# EAGLE board OLED_Block-Panel-v10 (EAGLE 6.6.0), part 1 of 2
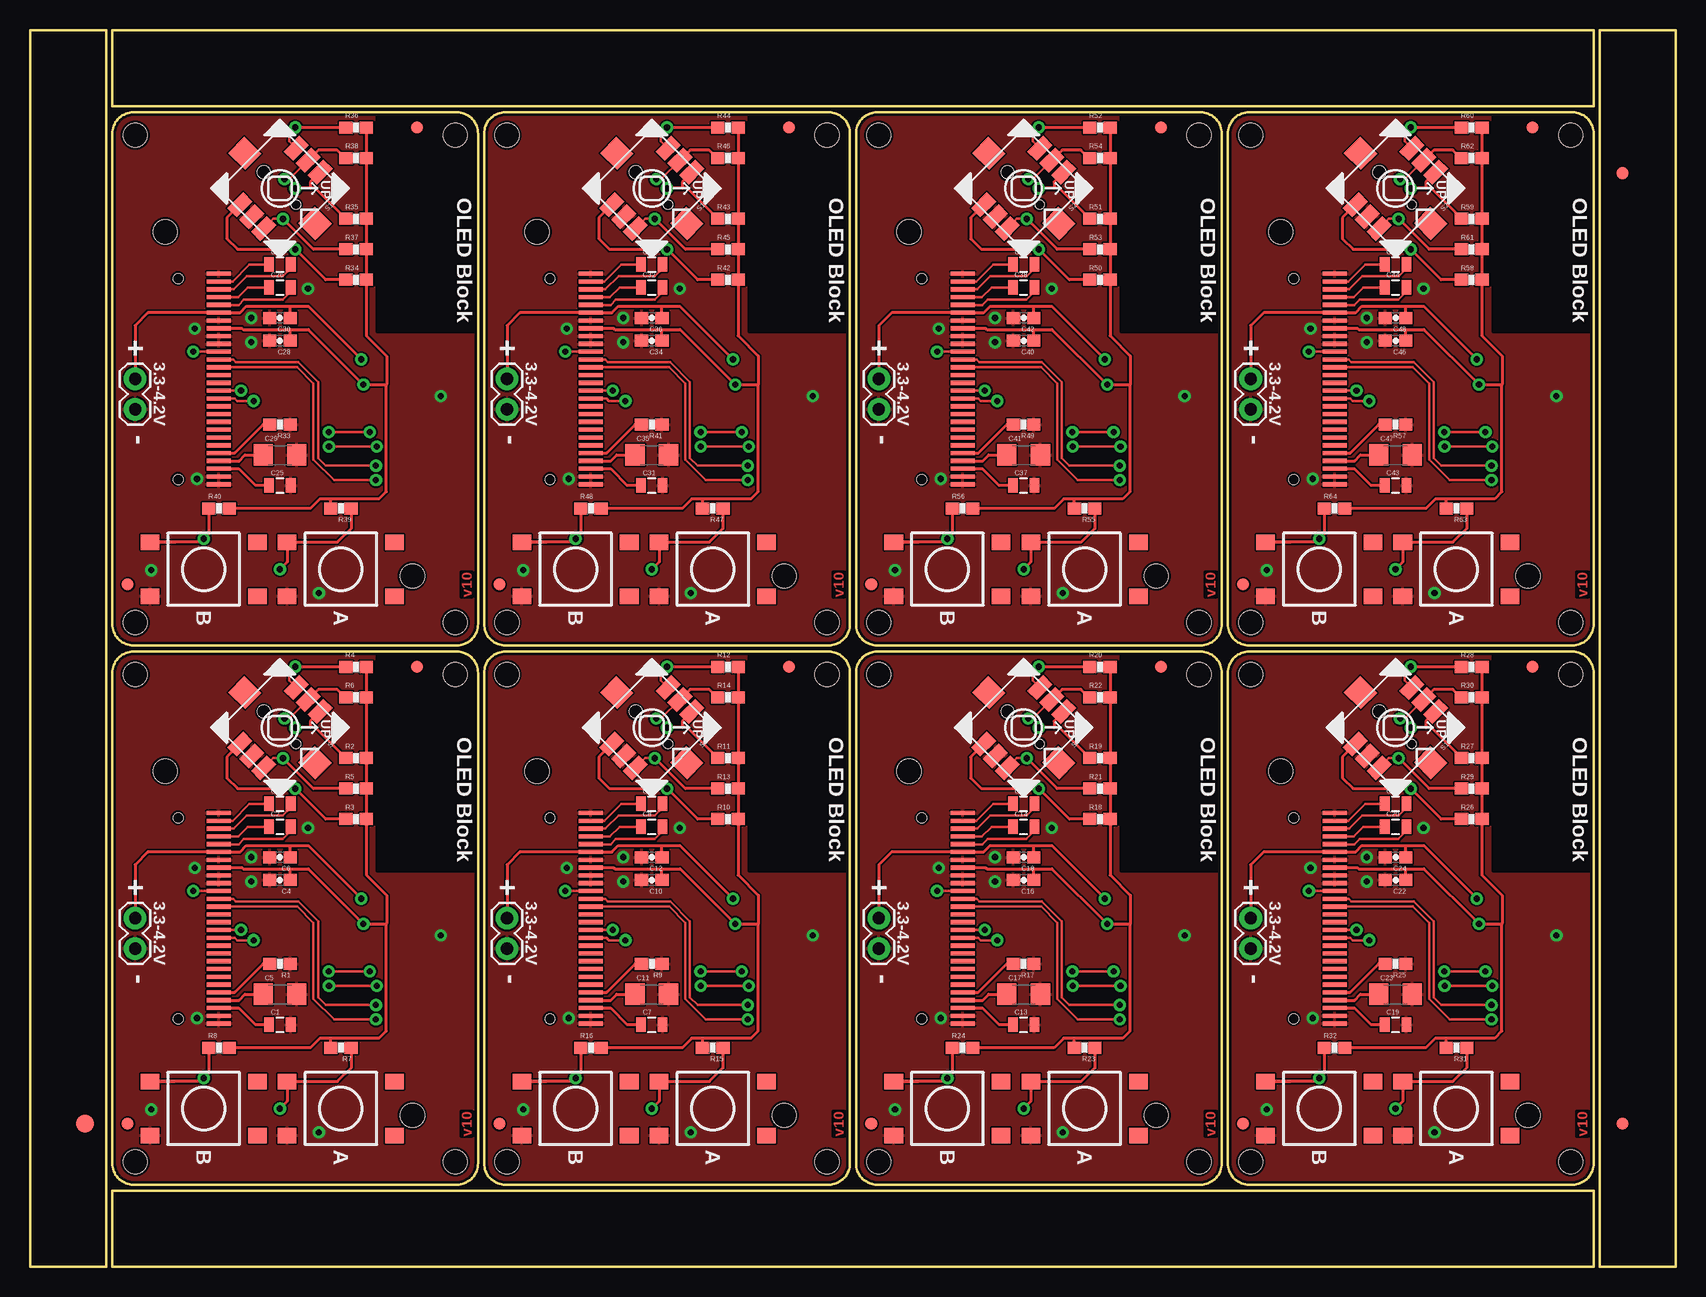
[diagram p0: board, top side]
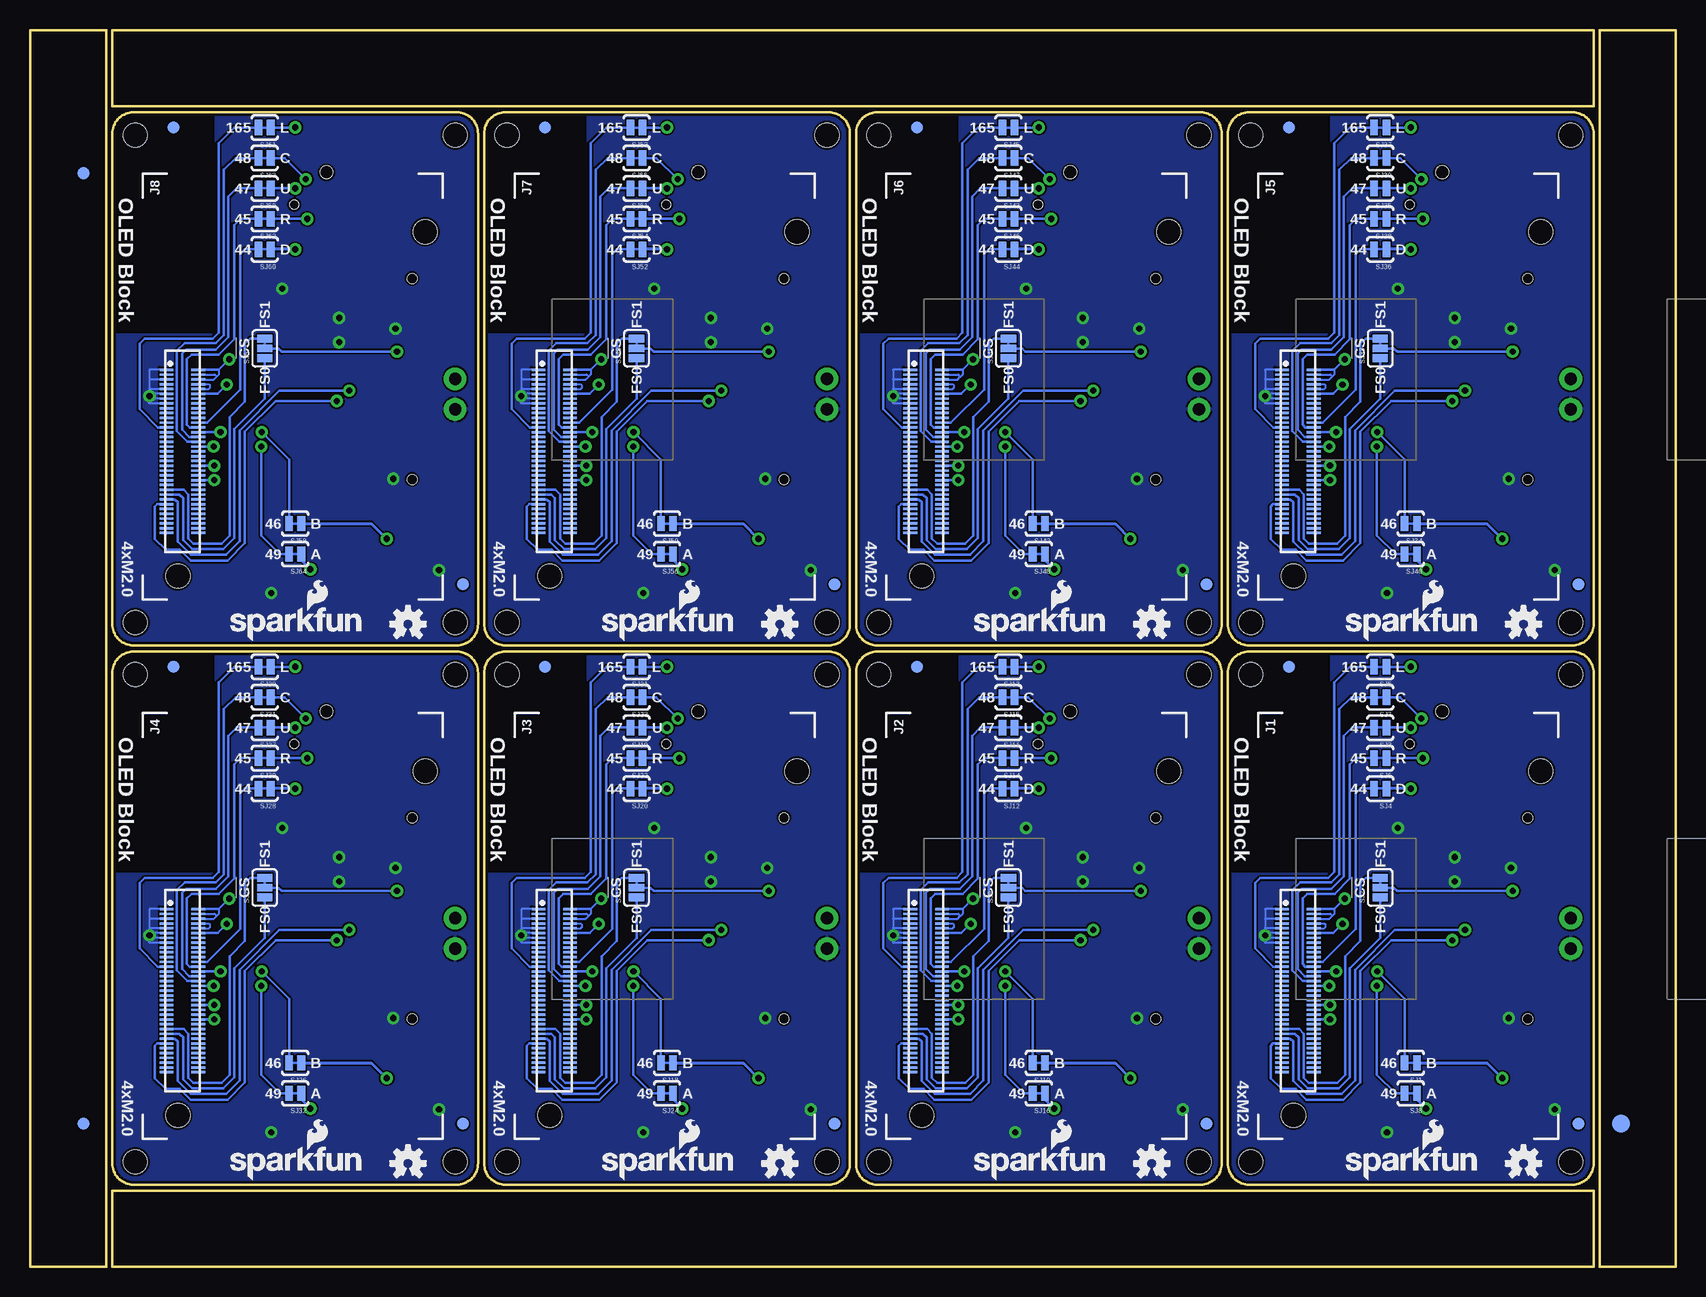
[diagram p1: board, bottom side, seen from below]

Size 137.16 x 103.12 mm. Coordinates in mm from the lower left corner, seen from the top.
Outline: 6.35,79.25 6.35,0 0,0 0,29.72
Outline: 137.16,79.25 137.16,0 130.81,0 130.81,29.72
Outline: 130.81,23.88 130.81,103.12 137.16,103.12 137.16,73.41
Outline: 0,23.88 0,103.12 6.35,103.12 6.35,73.41
Outline: 37.34,49.53 37.34,8.64 arc-90 35.56,6.86 8.64,6.86 arc-90 6.86,8.64 6.86,49.53 arc-90 8.64,51.31 35.56,51.31 arc-90 37.34,49.53
Outline: 68.33,49.53 68.33,8.64 arc-90 66.55,6.86 39.62,6.86 arc-90 37.85,8.64 37.85,49.53 arc-90 39.62,51.31 66.55,51.31 arc-90 68.33,49.53
Outline: 99.31,49.53 99.31,8.64 arc-90 97.54,6.86 70.61,6.86 arc-90 68.83,8.64 68.83,49.53 arc-90 70.61,51.31 97.54,51.31 arc-90 99.31,49.53
Outline: 130.3,49.53 130.3,8.64 arc-90 128.52,6.86 101.6,6.86 arc-90 99.82,8.64 99.82,49.53 arc-90 101.6,51.31 128.52,51.31 arc-90 130.3,49.53
Outline: 37.34,94.49 37.34,53.59 arc-90 35.56,51.82 8.64,51.82 arc-90 6.86,53.59 6.86,94.49 arc-90 8.64,96.27 35.56,96.27 arc-90 37.34,94.49
Outline: 68.33,94.49 68.33,53.59 arc-90 66.55,51.82 39.62,51.82 arc-90 37.85,53.59 37.85,94.49 arc-90 39.62,96.27 66.55,96.27 arc-90 68.33,94.49
Outline: 99.31,94.49 99.31,53.59 arc-90 97.54,51.82 70.61,51.82 arc-90 68.83,53.59 68.83,94.49 arc-90 70.61,96.27 97.54,96.27 arc-90 99.31,94.49
Outline: 130.3,94.49 130.3,53.59 arc-90 128.52,51.82 101.6,51.82 arc-90 99.82,53.59 99.82,94.49 arc-90 101.6,96.27 128.52,96.27 arc-90 130.3,94.49
Outline: 6.86,0 130.3,0 130.3,6.35 6.86,6.35 6.86,0
Outline: 130.3,103.12 6.86,103.12 6.86,96.77 130.3,96.77 130.3,103.12
Copper layers (1*16): Top 0.035mm / dielectric 1.5mm / Bottom 0.035mm
Design rules "SparkFun-2-layer *": minimum track width 6mil, minimum drill 13mil, track to track 6mil, track to pad 6mil, pad to pad 6mil, via to via 6mil, smd to smd 6mil, copper to edge 8mil, drill to drill 8mil, minimum pad ring 12mil, minimum via ring 10mil, stop-mask expansion 4mil, vias tented up to drill 20mil, thermal gap 6mil
Holes 2 mm at 35.43,8.76 8.76,8.76 8.76,49.4 35.43,49.4 66.42,8.76 39.75,8.76 39.75,49.4 66.42,49.4 97.41,8.76 70.74,8.76 70.74,49.4 97.41,49.4 128.4,8.76 101.73,8.76 101.73,49.4 128.4,49.4 35.43,53.72 8.76,53.72 8.76,94.36 35.43,94.36 66.42,53.72 39.75,53.72 39.75,94.36 66.42,94.36 97.41,53.72 70.74,53.72 70.74,94.36 97.41,94.36 128.4,53.72 101.73,53.72 101.73,94.36 128.4,94.36
tRestrict: area 29,33 to 37.3,51.3; area 59.9,33 to 68.3,51.3; area 90.9,33 to 99.3,51.3; area 121.9,33 to 130.3,51.3; area 29,78 to 37.3,96.3; area 59.9,78 to 68.3,96.3; area 90.9,78 to 99.3,96.3; area 121.9,78 to 130.3,96.3
bRestrict: area 29,33 to 37.3,51.3; area 59.9,33 to 68.3,51.3; area 90.9,33 to 99.3,51.3; area 121.9,33 to 130.3,51.3; area 29,78 to 37.3,96.3; area 59.9,78 to 68.3,96.3; area 90.9,78 to 99.3,96.3; area 121.9,78 to 130.3,96.3

## Footprints (pad centres in the part's own frame; a part is rotated, then mirrored left to right if it is on the bottom)
0805 = smd 0.8 x 1.2: 1 -0.9,0; 2 0.9,0
0603-CAP = smd 1.1 x 1: 1 -0.85,0; 2 0.85,0
1206 = smd 1.6 x 1.8: 1 -1.4,0; 2 1.4,0
FIDUCIAL-1.5X3 = smd 1.5 x 1.5: 1 0,0
FIDUCIAL-1X2 = smd 1 x 1: 1 0,0
EDISON_DAUGHTER = smd 1.14 x 0.2: 1 1.98,19.17; 2 4.62,19.17; 3 1.98,18.77; 4 4.62,18.77; 5 1.98,18.37; 6 4.62,18.37; 7 1.98,17.97; 8 4.62,17.97; 9 1.98,17.57; 10 4.62,17.57; 11 1.98,17.17; 12 4.62,17.17; 13 1.98,16.77; 14 4.62,16.77; 15 1.98,16.37; 16 4.62,16.37; 17 1.98,15.97; 18 4.62,15.97; 19 1.98,15.57; 20 4.62,15.57; 21 1.98,15.17; 22 4.62,15.17; 23 1.98,14.77; 24 4.62,14.77; 25 1.98,14.37; 26 4.62,14.37; 27 1.98,13.97; 28 4.62,13.97; 29 1.98,13.57; 30 4.62,13.57; 31 1.98,13.17; 32 4.62,13.17; 33 1.98,12.77; 34 4.62,12.77; 35 1.98,12.37; 36 4.62,12.37; 37 1.98,11.97; 38 4.62,11.97; 39 1.98,11.57; 40 4.62,11.57; 41 1.98,11.17; 42 4.62,11.17; 43 1.98,10.77; 44 4.62,10.77; 45 1.98,10.37; 46 4.62,10.37; 47 1.98,9.97; 48 4.62,9.97; 49 1.98,9.57; 50 4.62,9.57; 51 1.98,9.17; 52 4.62,9.17; 53 1.98,8.77; 54 4.62,8.77; 55 1.98,8.37; 56 4.62,8.37; 57 1.98,7.97; 58 4.62,7.97; 59 1.98,7.57; 60 4.62,7.57; 61 1.98,7.17; 62 4.62,7.17; 63 1.98,6.77; 64 4.62,6.77; 65 1.98,6.37; 66 4.62,6.37; 67 1.98,5.97; 68 4.62,5.97; 69 1.98,5.57; 70 4.62,5.57 | hole 2: 23.53,30.67; 2.93,1.98
1X02 = drill 1.016 pad 1.88: 1 0,0; 2 2.54,0
OLED-0.66-64X48 = smd 0.35 x 2: 1 0,0; 2 0.65,0; 3 1.3,0; 4 1.95,0; 5 2.6,0; 6 3.25,0; 7 3.9,0; 8 4.55,0; 9 5.2,0; 10 5.85,0; 11 6.5,0; 12 7.15,0; 13 7.8,0; 14 8.45,0; 15 9.1,0; 16 9.75,0; 17 10.4,0; 18 11.05,0; 19 11.7,0; 20 12.35,0; 21 13,0; 22 13.65,0; 23 14.3,0; 24 14.95,0; 25 15.6,0; 26 16.25,0; 27 16.9,0; 28 17.55,0 | hole 0.8: 17.15,-3.4; 0.4,-3.4
0603-RES = smd 1.1 x 1: 1 -0.85,0; 2 0.85,0
TACTILE_SWITCH_TALL = smd 1.55 x 1.3: A1 -4.475,-2.25; A2 4.475,-2.25; B1 -4.475,2.25; B2 4.475,2.25
JOYSTICK_MINI = smd 1.85 x 1.1: A -3.325,1.4; B 3.325,1.4; C -3.325,-1.4; CTR -3.325,0; D 3.325,-1.4; GND 3.325,0 | smd 1.9 x 2: NC 0,4.13; NC@0 0,-4.13 | hole 0.75: 0,1.9 | hole 1.05: 0,-1.9
PAD-JUMPER-2-NC_BY_TRACE_YES_SILK = smd 0.635 x 1.27: 1 -0.508,0; 2 0.508,0
PAD-JUMPER-3-2OF3_NC_BY_TRACE_YES_SILK_FULL_BOX = smd 0.635 x 1.27: 1 -0.813,0; 2 0,0; 3 0.813,0

## Placement (x,y rotation side)
C1  2.2uF  [0805]  20.83,20.19 0 top
C2  1uF X5R  [0805]  20.83,36.7 0 top
C3  1uF X5R  [0805]  20.83,38.61 0 top
C4  1uF  [0603-CAP]  20.83,32.26 180 top
C5  4.7uF/16V  [1206]  20.83,22.73 0 top
C6  1uF  [0603-CAP]  20.83,34.16 180 top
C7  2.2uF  [0805]  51.82,20.19 0 top
C8  1uF X5R  [0805]  51.82,36.7 0 top
C9  1uF X5R  [0805]  51.82,38.61 0 top
C10  1uF  [0603-CAP]  51.82,32.26 180 top
C11  4.7uF/16V  [1206]  51.82,22.73 0 top
C12  1uF  [0603-CAP]  51.82,34.16 180 top
C13  2.2uF  [0805]  82.8,20.19 0 top
C14  1uF X5R  [0805]  82.8,36.7 0 top
C15  1uF X5R  [0805]  82.8,38.61 0 top
C16  1uF  [0603-CAP]  82.8,32.26 180 top
C17  4.7uF/16V  [1206]  82.8,22.73 0 top
C18  1uF  [0603-CAP]  82.8,34.16 180 top
C19  2.2uF  [0805]  113.79,20.19 0 top
C20  1uF X5R  [0805]  113.79,36.7 0 top
C21  1uF X5R  [0805]  113.79,38.61 0 top
C22  1uF  [0603-CAP]  113.79,32.26 180 top
C23  4.7uF/16V  [1206]  113.79,22.73 0 top
C24  1uF  [0603-CAP]  113.79,34.16 180 top
C25  2.2uF  [0805]  20.83,65.15 0 top
C26  1uF X5R  [0805]  20.83,81.66 0 top
C27  1uF X5R  [0805]  20.83,83.57 0 top
C28  1uF  [0603-CAP]  20.83,77.22 180 top
C29  4.7uF/16V  [1206]  20.83,67.69 0 top
C30  1uF  [0603-CAP]  20.83,79.12 180 top
C31  2.2uF  [0805]  51.82,65.15 0 top
C32  1uF X5R  [0805]  51.82,81.66 0 top
C33  1uF X5R  [0805]  51.82,83.57 0 top
C34  1uF  [0603-CAP]  51.82,77.22 180 top
C35  4.7uF/16V  [1206]  51.82,67.69 0 top
C36  1uF  [0603-CAP]  51.82,79.12 180 top
C37  2.2uF  [0805]  82.8,65.15 0 top
C38  1uF X5R  [0805]  82.8,81.66 0 top
C39  1uF X5R  [0805]  82.8,83.57 0 top
C40  1uF  [0603-CAP]  82.8,77.22 180 top
C41  4.7uF/16V  [1206]  82.8,67.69 0 top
C42  1uF  [0603-CAP]  82.8,79.12 180 top
C43  2.2uF  [0805]  113.79,65.15 0 top
C44  1uF X5R  [0805]  113.79,81.66 0 top
C45  1uF X5R  [0805]  113.79,83.57 0 top
C46  1uF  [0603-CAP]  113.79,77.22 180 top
C47  4.7uF/16V  [1206]  113.79,67.69 0 top
C48  1uF  [0603-CAP]  113.79,79.12 180 top
E$1  [FIDUCIAL-1.5X3]  4.57,11.94 0 top
E$2  [FIDUCIAL-1.5X3]  4.57,11.94 0 bottom
E$3  [FIDUCIAL-1X2]  132.72,11.94 0 bottom
E$4  [FIDUCIAL-1X2]  132.72,11.94 0 top
E$5  [FIDUCIAL-1X2]  132.72,91.19 180 top
E$6  [FIDUCIAL-1X2]  132.72,91.19 180 bottom
FID1  FIDUCIAL1X2  [FIDUCIAL-1X2]  32.26,50.04 0 bottom
FID2  FIDUCIAL1X2  [FIDUCIAL-1X2]  8.13,11.94 0 top
FID3  FIDUCIAL1X2  [FIDUCIAL-1X2]  8.13,11.94 0 bottom
FID4  FIDUCIAL1X2  [FIDUCIAL-1X2]  32.26,50.04 0 top
FID5  FIDUCIAL1X2  [FIDUCIAL-1X2]  63.25,50.04 0 bottom
FID6  FIDUCIAL1X2  [FIDUCIAL-1X2]  39.12,11.94 0 top
FID7  FIDUCIAL1X2  [FIDUCIAL-1X2]  39.12,11.94 0 bottom
FID8  FIDUCIAL1X2  [FIDUCIAL-1X2]  63.25,50.04 0 top
FID9  FIDUCIAL1X2  [FIDUCIAL-1X2]  94.23,50.04 0 bottom
FID10  FIDUCIAL1X2  [FIDUCIAL-1X2]  70.1,11.94 0 top
FID11  FIDUCIAL1X2  [FIDUCIAL-1X2]  70.1,11.94 0 bottom
FID12  FIDUCIAL1X2  [FIDUCIAL-1X2]  94.23,50.04 0 top
FID13  FIDUCIAL1X2  [FIDUCIAL-1X2]  125.22,50.04 0 bottom
FID14  FIDUCIAL1X2  [FIDUCIAL-1X2]  101.09,11.94 0 top
FID15  FIDUCIAL1X2  [FIDUCIAL-1X2]  101.09,11.94 0 bottom
FID16  FIDUCIAL1X2  [FIDUCIAL-1X2]  125.22,50.04 0 top
FID17  FIDUCIAL1X2  [FIDUCIAL-1X2]  32.26,95 0 bottom
FID18  FIDUCIAL1X2  [FIDUCIAL-1X2]  8.13,56.9 0 top
FID19  FIDUCIAL1X2  [FIDUCIAL-1X2]  8.13,56.9 0 bottom
FID20  FIDUCIAL1X2  [FIDUCIAL-1X2]  32.26,95 0 top
FID21  FIDUCIAL1X2  [FIDUCIAL-1X2]  63.25,95 0 bottom
FID22  FIDUCIAL1X2  [FIDUCIAL-1X2]  39.12,56.9 0 top
FID23  FIDUCIAL1X2  [FIDUCIAL-1X2]  39.12,56.9 0 bottom
FID24  FIDUCIAL1X2  [FIDUCIAL-1X2]  63.25,95 0 top
FID25  FIDUCIAL1X2  [FIDUCIAL-1X2]  94.23,95 0 bottom
FID26  FIDUCIAL1X2  [FIDUCIAL-1X2]  70.1,56.9 0 top
FID27  FIDUCIAL1X2  [FIDUCIAL-1X2]  70.1,56.9 0 bottom
FID28  FIDUCIAL1X2  [FIDUCIAL-1X2]  94.23,95 0 top
FID29  FIDUCIAL1X2  [FIDUCIAL-1X2]  125.22,95 0 bottom
FID30  FIDUCIAL1X2  [FIDUCIAL-1X2]  101.09,56.9 0 top
FID31  FIDUCIAL1X2  [FIDUCIAL-1X2]  101.09,56.9 0 bottom
FID32  FIDUCIAL1X2  [FIDUCIAL-1X2]  125.22,95 0 top
J1  EDISON_CONNECTOR_FULLMOUNTING_HOLES  [EDISON_DAUGHTER]  34.8,10.67 0 bottom
J2  EDISON_CONNECTOR_FULLMOUNTING_HOLES  [EDISON_DAUGHTER]  65.79,10.67 0 bottom
J3  EDISON_CONNECTOR_FULLMOUNTING_HOLES  [EDISON_DAUGHTER]  96.77,10.67 0 bottom
J4  EDISON_CONNECTOR_FULLMOUNTING_HOLES  [EDISON_DAUGHTER]  127.76,10.67 0 bottom
J5  EDISON_CONNECTOR_FULLMOUNTING_HOLES  [EDISON_DAUGHTER]  34.8,55.63 0 bottom
J6  EDISON_CONNECTOR_FULLMOUNTING_HOLES  [EDISON_DAUGHTER]  65.79,55.63 0 bottom
J7  EDISON_CONNECTOR_FULLMOUNTING_HOLES  [EDISON_DAUGHTER]  96.77,55.63 0 bottom
J8  EDISON_CONNECTOR_FULLMOUNTING_HOLES  [EDISON_DAUGHTER]  127.76,55.63 0 bottom
JP1  M02PTH  [1X02]  8.76,26.54 90 top
JP2  M02PTH  [1X02]  39.75,26.54 90 top
JP3  M02PTH  [1X02]  70.74,26.54 90 top
JP4  M02PTH  [1X02]  101.73,26.54 90 top
JP5  M02PTH  [1X02]  8.76,71.5 90 top
JP6  M02PTH  [1X02]  39.75,71.5 90 top
JP7  M02PTH  [1X02]  70.74,71.5 90 top
JP8  M02PTH  [1X02]  101.73,71.5 90 top
LOGO1  OSHW-LOGOS  [OSHW-LOGO-S]  43.69,8.64 0 bottom
LOGO2  OSHW-LOGOS  [OSHW-LOGO-S]  12.7,8.64 0 bottom
LOGO3  SFE_LOGO_NAME_FLAME.1_INCH  [SFE_LOGO_NAME_FLAME_.1]  27.94,7.11 0 bottom
LOGO4  SFE_LOGO_NAME_FLAME.1_INCH  [SFE_LOGO_NAME_FLAME_.1]  58.93,7.11 0 bottom
LOGO5  OSHW-LOGOS  [OSHW-LOGO-S]  74.68,8.64 0 bottom
LOGO6  SFE_LOGO_NAME_FLAME.1_INCH  [SFE_LOGO_NAME_FLAME_.1]  89.92,7.11 0 bottom
LOGO7  OSHW-LOGOS  [OSHW-LOGO-S]  105.66,8.64 0 bottom
LOGO8  SFE_LOGO_NAME_FLAME.1_INCH  [SFE_LOGO_NAME_FLAME_.1]  120.9,7.11 0 bottom
LOGO9  OSHW-LOGOS  [OSHW-LOGO-S]  12.7,53.59 0 bottom
LOGO10  SFE_LOGO_NAME_FLAME.1_INCH  [SFE_LOGO_NAME_FLAME_.1]  27.94,52.07 0 bottom
LOGO11  OSHW-LOGOS  [OSHW-LOGO-S]  43.69,53.59 0 bottom
LOGO12  SFE_LOGO_NAME_FLAME.1_INCH  [SFE_LOGO_NAME_FLAME_.1]  58.93,52.07 0 bottom
LOGO13  OSHW-LOGOS  [OSHW-LOGO-S]  74.68,53.59 0 bottom
LOGO14  SFE_LOGO_NAME_FLAME.1_INCH  [SFE_LOGO_NAME_FLAME_.1]  89.92,52.07 0 bottom
LOGO15  OSHW-LOGOS  [OSHW-LOGO-S]  105.66,53.59 0 bottom
LOGO16  SFE_LOGO_NAME_FLAME.1_INCH  [SFE_LOGO_NAME_FLAME_.1]  120.9,52.07 0 bottom
OLED1  OLED0.66  [OLED-0.66-64X48]  15.75,37.85 270 top
OLED2  OLED0.66  [OLED-0.66-64X48]  46.74,37.85 270 top
OLED3  OLED0.66  [OLED-0.66-64X48]  77.72,37.85 270 top
OLED4  OLED0.66  [OLED-0.66-64X48]  108.71,37.85 270 top
OLED5  OLED0.66  [OLED-0.66-64X48]  15.75,82.8 270 top
OLED6  OLED0.66  [OLED-0.66-64X48]  46.74,82.8 270 top
OLED7  OLED0.66  [OLED-0.66-64X48]  77.72,82.8 270 top
OLED8  OLED0.66  [OLED-0.66-64X48]  108.71,82.8 270 top
R1  390k  [0603-RES]  20.83,25.27 180 top
R2  10K  [0603-RES]  27.18,42.42 0 top
R3  10K  [0603-RES]  27.18,37.34 0 top
R4  10K  [0603-RES]  27.18,50.04 0 top
R5  10K  [0603-RES]  27.18,39.88 0 top
R6  10K  [0603-RES]  27.18,47.5 0 top
R7  10K  [0603-RES]  25.91,18.29 180 top
R8  10K  [0603-RES]  15.75,18.29 0 top
R9  390k  [0603-RES]  51.82,25.27 180 top
R10  10K  [0603-RES]  58.17,37.34 0 top
R11  10K  [0603-RES]  58.17,42.42 0 top
R12  10K  [0603-RES]  58.17,50.04 0 top
R13  10K  [0603-RES]  58.17,39.88 0 top
R14  10K  [0603-RES]  58.17,47.5 0 top
R15  10K  [0603-RES]  56.9,18.29 180 top
R16  10K  [0603-RES]  46.74,18.29 0 top
R17  390k  [0603-RES]  82.8,25.27 180 top
R18  10K  [0603-RES]  89.15,37.34 0 top
R19  10K  [0603-RES]  89.15,42.42 0 top
R20  10K  [0603-RES]  89.15,50.04 0 top
R21  10K  [0603-RES]  89.15,39.88 0 top
R22  10K  [0603-RES]  89.15,47.5 0 top
R23  10K  [0603-RES]  87.88,18.29 180 top
R24  10K  [0603-RES]  77.72,18.29 0 top
R25  390k  [0603-RES]  113.79,25.27 180 top
R26  10K  [0603-RES]  120.14,37.34 0 top
R27  10K  [0603-RES]  120.14,42.42 0 top
R28  10K  [0603-RES]  120.14,50.04 0 top
R29  10K  [0603-RES]  120.14,39.88 0 top
R30  10K  [0603-RES]  120.14,47.5 0 top
R31  10K  [0603-RES]  118.87,18.29 180 top
R32  10K  [0603-RES]  108.71,18.29 0 top
R33  390k  [0603-RES]  20.83,70.23 180 top
R34  10K  [0603-RES]  27.18,82.3 0 top
R35  10K  [0603-RES]  27.18,87.38 0 top
R36  10K  [0603-RES]  27.18,95 0 top
R37  10K  [0603-RES]  27.18,84.84 0 top
R38  10K  [0603-RES]  27.18,92.46 0 top
R39  10K  [0603-RES]  25.91,63.25 180 top
R40  10K  [0603-RES]  15.75,63.25 0 top
R41  390k  [0603-RES]  51.82,70.23 180 top
R42  10K  [0603-RES]  58.17,82.3 0 top
R43  10K  [0603-RES]  58.17,87.38 0 top
R44  10K  [0603-RES]  58.17,95 0 top
R45  10K  [0603-RES]  58.17,84.84 0 top
R46  10K  [0603-RES]  58.17,92.46 0 top
R47  10K  [0603-RES]  56.9,63.25 180 top
R48  10K  [0603-RES]  46.74,63.25 0 top
R49  390k  [0603-RES]  82.8,70.23 180 top
R50  10K  [0603-RES]  89.15,82.3 0 top
R51  10K  [0603-RES]  89.15,87.38 0 top
R52  10K  [0603-RES]  89.15,95 0 top
R53  10K  [0603-RES]  89.15,84.84 0 top
R54  10K  [0603-RES]  89.15,92.46 0 top
R55  10K  [0603-RES]  87.88,63.25 180 top
R56  10K  [0603-RES]  77.72,63.25 0 top
R57  390k  [0603-RES]  113.79,70.23 180 top
R58  10K  [0603-RES]  120.14,82.3 0 top
R59  10K  [0603-RES]  120.14,87.38 0 top
R60  10K  [0603-RES]  120.14,95 0 top
R61  10K  [0603-RES]  120.14,84.84 0 top
R62  10K  [0603-RES]  120.14,92.46 0 top
R63  10K  [0603-RES]  118.87,63.25 180 top
R64  10K  [0603-RES]  108.71,63.25 0 top
S1  Button A  [TACTILE_SWITCH_TALL]  25.91,13.21 180 top
S2  Button B  [TACTILE_SWITCH_TALL]  14.48,13.21 180 top
S3  [JOYSTICK_MINI]  20.83,44.96 225 top
S4  Button A  [TACTILE_SWITCH_TALL]  56.9,13.21 180 top
S5  Button B  [TACTILE_SWITCH_TALL]  45.47,13.21 180 top
S6  [JOYSTICK_MINI]  51.82,44.96 225 top
S7  Button A  [TACTILE_SWITCH_TALL]  87.88,13.21 180 top
S8  Button B  [TACTILE_SWITCH_TALL]  76.45,13.21 180 top
S9  [JOYSTICK_MINI]  82.8,44.96 225 top
S10  Button A  [TACTILE_SWITCH_TALL]  118.87,13.21 180 top
S11  Button B  [TACTILE_SWITCH_TALL]  107.44,13.21 180 top
S12  [JOYSTICK_MINI]  113.79,44.96 225 top
S13  Button A  [TACTILE_SWITCH_TALL]  25.91,58.17 180 top
S14  Button B  [TACTILE_SWITCH_TALL]  14.48,58.17 180 top
S15  [JOYSTICK_MINI]  20.83,89.92 225 top
S16  Button A  [TACTILE_SWITCH_TALL]  56.9,58.17 180 top
S17  Button B  [TACTILE_SWITCH_TALL]  45.47,58.17 180 top
S18  [JOYSTICK_MINI]  51.82,89.92 225 top
S19  Button A  [TACTILE_SWITCH_TALL]  87.88,58.17 180 top
S20  Button B  [TACTILE_SWITCH_TALL]  76.45,58.17 180 top
S21  [JOYSTICK_MINI]  82.8,89.92 225 top
S22  Button A  [TACTILE_SWITCH_TALL]  118.87,58.17 180 top
S23  Button B  [TACTILE_SWITCH_TALL]  107.44,58.17 180 top
S24  [JOYSTICK_MINI]  113.79,89.92 225 top
SJ1  [PAD-JUMPER-2-NC_BY_TRACE_YES_SILK]  22.1,17.02 180 bottom
SJ2  CS_SEL  [PAD-JUMPER-3-2OF3_NC_BY_TRACE_YES_SILK_FULL_BOX]  24.64,31.62 90 bottom
SJ3  [PAD-JUMPER-2-NC_BY_TRACE_YES_SILK]  24.64,44.96 180 bottom
SJ4  [PAD-JUMPER-2-NC_BY_TRACE_YES_SILK]  24.64,39.88 180 bottom
SJ5  [PAD-JUMPER-2-NC_BY_TRACE_YES_SILK]  24.64,50.04 180 bottom
SJ6  [PAD-JUMPER-2-NC_BY_TRACE_YES_SILK]  24.64,42.42 180 bottom
SJ7  [PAD-JUMPER-2-NC_BY_TRACE_YES_SILK]  24.64,47.5 180 bottom
SJ8  [PAD-JUMPER-2-NC_BY_TRACE_YES_SILK]  22.1,14.48 180 bottom
SJ9  CS_SEL  [PAD-JUMPER-3-2OF3_NC_BY_TRACE_YES_SILK_FULL_BOX]  55.63,31.62 90 bottom
SJ10  [PAD-JUMPER-2-NC_BY_TRACE_YES_SILK]  53.09,17.02 180 bottom
SJ11  [PAD-JUMPER-2-NC_BY_TRACE_YES_SILK]  55.63,44.96 180 bottom
SJ12  [PAD-JUMPER-2-NC_BY_TRACE_YES_SILK]  55.63,39.88 180 bottom
SJ13  [PAD-JUMPER-2-NC_BY_TRACE_YES_SILK]  55.63,50.04 180 bottom
SJ14  [PAD-JUMPER-2-NC_BY_TRACE_YES_SILK]  55.63,42.42 180 bottom
SJ15  [PAD-JUMPER-2-NC_BY_TRACE_YES_SILK]  55.63,47.5 180 bottom
SJ16  [PAD-JUMPER-2-NC_BY_TRACE_YES_SILK]  53.09,14.48 180 bottom
SJ17  CS_SEL  [PAD-JUMPER-3-2OF3_NC_BY_TRACE_YES_SILK_FULL_BOX]  86.61,31.62 90 bottom
SJ18  [PAD-JUMPER-2-NC_BY_TRACE_YES_SILK]  84.07,17.02 180 bottom
SJ19  [PAD-JUMPER-2-NC_BY_TRACE_YES_SILK]  86.61,44.96 180 bottom
SJ20  [PAD-JUMPER-2-NC_BY_TRACE_YES_SILK]  86.61,39.88 180 bottom
SJ21  [PAD-JUMPER-2-NC_BY_TRACE_YES_SILK]  86.61,50.04 180 bottom
SJ22  [PAD-JUMPER-2-NC_BY_TRACE_YES_SILK]  86.61,42.42 180 bottom
SJ23  [PAD-JUMPER-2-NC_BY_TRACE_YES_SILK]  86.61,47.5 180 bottom
SJ24  [PAD-JUMPER-2-NC_BY_TRACE_YES_SILK]  84.07,14.48 180 bottom
SJ25  CS_SEL  [PAD-JUMPER-3-2OF3_NC_BY_TRACE_YES_SILK_FULL_BOX]  117.6,31.62 90 bottom
SJ26  [PAD-JUMPER-2-NC_BY_TRACE_YES_SILK]  115.06,17.02 180 bottom
SJ27  [PAD-JUMPER-2-NC_BY_TRACE_YES_SILK]  117.6,44.96 180 bottom
SJ28  [PAD-JUMPER-2-NC_BY_TRACE_YES_SILK]  117.6,39.88 180 bottom
SJ29  [PAD-JUMPER-2-NC_BY_TRACE_YES_SILK]  117.6,50.04 180 bottom
SJ30  [PAD-JUMPER-2-NC_BY_TRACE_YES_SILK]  117.6,42.42 180 bottom
SJ31  [PAD-JUMPER-2-NC_BY_TRACE_YES_SILK]  117.6,47.5 180 bottom
SJ32  [PAD-JUMPER-2-NC_BY_TRACE_YES_SILK]  115.06,14.48 180 bottom
SJ33  CS_SEL  [PAD-JUMPER-3-2OF3_NC_BY_TRACE_YES_SILK_FULL_BOX]  24.64,76.58 90 bottom
SJ34  [PAD-JUMPER-2-NC_BY_TRACE_YES_SILK]  22.1,61.98 180 bottom
SJ35  [PAD-JUMPER-2-NC_BY_TRACE_YES_SILK]  24.64,89.92 180 bottom
SJ36  [PAD-JUMPER-2-NC_BY_TRACE_YES_SILK]  24.64,84.84 180 bottom
SJ37  [PAD-JUMPER-2-NC_BY_TRACE_YES_SILK]  24.64,95 180 bottom
SJ38  [PAD-JUMPER-2-NC_BY_TRACE_YES_SILK]  24.64,87.38 180 bottom
SJ39  [PAD-JUMPER-2-NC_BY_TRACE_YES_SILK]  24.64,92.46 180 bottom
SJ40  [PAD-JUMPER-2-NC_BY_TRACE_YES_SILK]  22.1,59.44 180 bottom
SJ41  CS_SEL  [PAD-JUMPER-3-2OF3_NC_BY_TRACE_YES_SILK_FULL_BOX]  55.63,76.58 90 bottom
SJ42  [PAD-JUMPER-2-NC_BY_TRACE_YES_SILK]  53.09,61.98 180 bottom
SJ43  [PAD-JUMPER-2-NC_BY_TRACE_YES_SILK]  55.63,89.92 180 bottom
SJ44  [PAD-JUMPER-2-NC_BY_TRACE_YES_SILK]  55.63,84.84 180 bottom
SJ45  [PAD-JUMPER-2-NC_BY_TRACE_YES_SILK]  55.63,95 180 bottom
SJ46  [PAD-JUMPER-2-NC_BY_TRACE_YES_SILK]  55.63,87.38 180 bottom
SJ47  [PAD-JUMPER-2-NC_BY_TRACE_YES_SILK]  55.63,92.46 180 bottom
SJ48  [PAD-JUMPER-2-NC_BY_TRACE_YES_SILK]  53.09,59.44 180 bottom
SJ49  CS_SEL  [PAD-JUMPER-3-2OF3_NC_BY_TRACE_YES_SILK_FULL_BOX]  86.61,76.58 90 bottom
SJ50  [PAD-JUMPER-2-NC_BY_TRACE_YES_SILK]  84.07,61.98 180 bottom
SJ51  [PAD-JUMPER-2-NC_BY_TRACE_YES_SILK]  86.61,89.92 180 bottom
SJ52  [PAD-JUMPER-2-NC_BY_TRACE_YES_SILK]  86.61,84.84 180 bottom
SJ53  [PAD-JUMPER-2-NC_BY_TRACE_YES_SILK]  86.61,95 180 bottom
SJ54  [PAD-JUMPER-2-NC_BY_TRACE_YES_SILK]  86.61,87.38 180 bottom
SJ55  [PAD-JUMPER-2-NC_BY_TRACE_YES_SILK]  86.61,92.46 180 bottom
SJ56  [PAD-JUMPER-2-NC_BY_TRACE_YES_SILK]  84.07,59.44 180 bottom
SJ57  CS_SEL  [PAD-JUMPER-3-2OF3_NC_BY_TRACE_YES_SILK_FULL_BOX]  117.6,76.58 90 bottom
SJ58  [PAD-JUMPER-2-NC_BY_TRACE_YES_SILK]  115.06,61.98 180 bottom
SJ59  [PAD-JUMPER-2-NC_BY_TRACE_YES_SILK]  117.6,89.92 180 bottom
SJ60  [PAD-JUMPER-2-NC_BY_TRACE_YES_SILK]  117.6,84.84 180 bottom
SJ61  [PAD-JUMPER-2-NC_BY_TRACE_YES_SILK]  117.6,95 180 bottom
SJ62  [PAD-JUMPER-2-NC_BY_TRACE_YES_SILK]  117.6,87.38 180 bottom
SJ63  [PAD-JUMPER-2-NC_BY_TRACE_YES_SILK]  117.6,92.46 180 bottom
SJ64  [PAD-JUMPER-2-NC_BY_TRACE_YES_SILK]  115.06,59.44 180 bottom

## Library data of the parts
C1-C48 R1 R9 R17 R25 R33 R41 R49 R57 SJ1-SJ64 = SparkFun-Passives
E$1 E$2 = SparkFun-Retired
E$3-E$6 FID1-FID32 LOGO1-LOGO16 = SparkFun-Aesthetics
J1-J8 = Edison
JP1-JP8 = SparkFun-Connectors
OLED1-OLED8 = SparkFun-Displays
R2-R8 R10-R16 R18-R24 R26-R32 R34-R40 R42-R48 R50-R56 R58-R64 = SparkFun-Resistors; PROD_ID: RES-00824
S1 S2 S4 S5 S7 S8 S10 S11 S13 S14 S16 S17 S19 S20 S22 S23 = SparkFun-Electromechanical; PROD_ID: SWCH-11966
S3 S6 S9 S12 S15 S18 S21 S24 = SparkFun-Electromechanical

## Nets
1.8V: C4.1 J1.12 OLED1.8 R2.2 R3.2 R4.2 R5.2 R6.2 R7.2 R8.2
1.8V1: C10.1 J2.12 OLED2.8 R10.2 R11.2 R12.2 R13.2 R14.2 R15.2 R16.2
1.8V2: C16.1 J3.12 OLED3.8 R18.2 R19.2 R20.2 R21.2 R22.2 R23.2 R24.2
1.8V3: C22.1 J4.12 OLED4.8 R26.2 R27.2 R28.2 R29.2 R30.2 R31.2 R32.2
1.8V4: C28.1 J5.12 OLED5.8 R34.2 R35.2 R36.2 R37.2 R38.2 R39.2 R40.2
1.8V5: C34.1 J6.12 OLED6.8 R42.2 R43.2 R44.2 R45.2 R46.2 R47.2 R48.2
1.8V6: C40.1 J7.12 OLED7.8 R50.2 R51.2 R52.2 R53.2 R54.2 R55.2 R56.2
1.8V7: C46.1 J8.12 OLED8.8 R58.2 R59.2 R60.2 R61.2 R62.2 R63.2 R64.2
3.3V: J1.8 J1.10
3.3V1: J2.8 J2.10
3.3V2: J3.8 J3.10
3.3V3: J4.8 J4.10
3.3V4: J5.8 J5.10
3.3V5: J6.8 J6.10
3.3V6: J7.8 J7.10
3.3V7: J8.8 J8.10
BUT_A: R7.1 S1.A2 SJ8.1
BUT_A1: R15.1 S4.A2 SJ16.1
BUT_A2: R23.1 S7.A2 SJ24.1
BUT_A3: R31.1 S10.A2 SJ32.1
BUT_A4: R39.1 S13.A2 SJ40.1
BUT_A5: R47.1 S16.A2 SJ48.1
BUT_A6: R55.1 S19.A2 SJ56.1
BUT_A7: R63.1 S22.A2 SJ64.1
BUT_B: R8.1 S2.A2 SJ1.1
BUT_B1: R16.1 S5.A2 SJ10.1
BUT_B2: R24.1 S8.A2 SJ18.1
BUT_B3: R32.1 S11.A2 SJ26.1
BUT_B4: R40.1 S14.A2 SJ34.1
BUT_B5: R48.1 S17.A2 SJ42.1
BUT_B6: R56.1 S20.A2 SJ50.1
BUT_B7: R64.1 S23.A2 SJ58.1
C1N: C2.2 OLED1.5
C1N1: C8.2 OLED2.5
C1N2: C14.2 OLED3.5
C1N3: C20.2 OLED4.5
C1N4: C26.2 OLED5.5
C1N5: C32.2 OLED6.5
C1N6: C38.2 OLED7.5
C1N7: C44.2 OLED8.5
C1P: C2.1 OLED1.4
C1P1: C8.1 OLED2.4
C1P2: C14.1 OLED3.4
C1P3: C20.1 OLED4.4
C1P4: C26.1 OLED5.4
C1P5: C32.1 OLED6.4
C1P6: C38.1 OLED7.4
C1P7: C44.1 OLED8.4
C2N: C3.2 OLED1.3
C2N1: C9.2 OLED2.3
C2N2: C15.2 OLED3.3
C2N3: C21.2 OLED4.3
C2N4: C27.2 OLED5.3
C2N5: C33.2 OLED6.3
C2N6: C39.2 OLED7.3
C2N7: C45.2 OLED8.3
C2P: C3.1 OLED1.2
C2P1: C9.1 OLED2.2
C2P2: C15.1 OLED3.2
C2P3: C21.1 OLED4.2
C2P4: C27.1 OLED5.2
C2P5: C33.1 OLED6.2
C2P6: C39.1 OLED7.2
C2P7: C45.1 OLED8.2
FAULT: J1.19
FAULT1: J2.19
FAULT2: J3.19
FAULT3: J4.19
FAULT4: J5.19
FAULT5: J6.19
FAULT6: J7.19
FAULT7: J8.19
FW_RCVR: J1.69
FW_RCVR1: J2.69
FW_RCVR2: J3.69
FW_RCVR3: J4.69
FW_RCVR4: J5.69
FW_RCVR5: J6.69
FW_RCVR6: J7.69
FW_RCVR7: J8.69
GND: C1.2 C4.2 C5.2 C6.2 J1.1 J1.5 J1.9 J1.11 J1.13 J1.15 JP1.1 OLED1.1 OLED1.7 OLED1.9 OLED1.10 OLED1.27 OLED1.28 R1.1 S1.B2 S2.B2 S3.GND
GND1: C7.2 C10.2 C11.2 C12.2 J2.1 J2.5 J2.9 J2.11 J2.13 J2.15 JP2.1 OLED2.1 OLED2.7 OLED2.9 OLED2.10 OLED2.27 OLED2.28 R9.1 S4.B2 S5.B2 S6.GND
GND2: C13.2 C16.2 C17.2 C18.2 J3.1 J3.5 J3.9 J3.11 J3.13 J3.15 JP3.1 OLED3.1 OLED3.7 OLED3.9 OLED3.10 OLED3.27 OLED3.28 R17.1 S7.B2 S8.B2 S9.GND
GND3: C19.2 C22.2 C23.2 C24.2 J4.1 J4.5 J4.9 J4.11 J4.13 J4.15 JP4.1 OLED4.1 OLED4.7 OLED4.9 OLED4.10 OLED4.27 OLED4.28 R25.1 S10.B2 S11.B2 S12.GND
GND4: C25.2 C28.2 C29.2 C30.2 J5.1 J5.5 J5.9 J5.11 J5.13 J5.15 JP5.1 OLED5.1 OLED5.7 OLED5.9 OLED5.10 OLED5.27 OLED5.28 R33.1 S13.B2 S14.B2 S15.GND
GND5: C31.2 C34.2 C35.2 C36.2 J6.1 J6.5 J6.9 J6.11 J6.13 J6.15 JP6.1 OLED6.1 OLED6.7 OLED6.9 OLED6.10 OLED6.27 OLED6.28 R41.1 S16.B2 S17.B2 S18.GND
GND6: C37.2 C40.2 C41.2 C42.2 J7.1 J7.5 J7.9 J7.11 J7.13 J7.15 JP7.1 OLED7.1 OLED7.7 OLED7.9 OLED7.10 OLED7.27 OLED7.28 R49.1 S19.B2 S20.B2 S21.GND
GND7: C43.2 C46.2 C47.2 C48.2 J8.1 J8.5 J8.9 J8.11 J8.13 J8.15 JP8.1 OLED8.1 OLED8.7 OLED8.9 OLED8.10 OLED8.27 OLED8.28 R57.1 S22.B2 S23.B2 S24.GND
GP1: J2.48 OLED2.13
GP2: J2.42 OLED2.12
GP3: J2.34 SJ16.2
GP4: J2.32 SJ15.2
GP5: J2.30 SJ11.2
GP6: J2.28 SJ10.2
GP7: J2.26 SJ14.2
GP8: J2.25 SJ13.2
GP9: J2.24 SJ12.2
GP10: J3.48 OLED3.13
GP11: J3.42 OLED3.12
GP12: J3.34 SJ24.2
GP12_PWM0: J1.35
GP12_PWM1: J2.35
GP12_PWM2: J3.35
GP12_PWM3: J4.35
GP12_PWM4: J5.35
GP12_PWM5: J6.35
GP12_PWM6: J7.35
GP12_PWM7: J8.35
GP13: J3.32 SJ23.2
GP13_PWM1: J1.33
GP13_PWM2: J2.33
GP13_PWM3: J3.33
GP13_PWM4: J4.33
GP13_PWM5: J5.33
GP13_PWM6: J6.33
GP13_PWM7: J7.33
GP13_PWM8: J8.33
GP14: J1.48 OLED1.13
GP15: J1.42 OLED1.12
GP16: J3.30 SJ19.2
GP17: J3.28 SJ18.2
GP18: J3.26 SJ22.2
GP19: J3.25 SJ21.2
GP19_I2C_1_SCL: J1.41
GP19_I2C_1_SCL1: J2.41
GP19_I2C_1_SCL2: J3.41
GP19_I2C_1_SCL3: J4.41
GP19_I2C_1_SCL4: J5.41
GP19_I2C_1_SCL5: J6.41
GP19_I2C_1_SCL6: J7.41
GP19_I2C_1_SCL7: J8.41
GP20: J3.24 SJ20.2
GP20_I2C_1_SDA: J1.43
GP20_I2C_1_SDA1: J2.43
GP20_I2C_1_SDA2: J3.43
GP20_I2C_1_SDA3: J4.43
GP20_I2C_1_SDA4: J5.43
GP20_I2C_1_SDA5: J6.43
GP20_I2C_1_SDA6: J7.43
GP20_I2C_1_SDA7: J8.43
GP21: J4.48 OLED4.13
GP22: J4.42 OLED4.12
GP23: J4.34 SJ32.2
GP24: J4.32 SJ31.2
GP25: J4.30 SJ27.2
GP26: J4.28 SJ26.2
GP27: J4.26 SJ30.2
GP27_I2C_6_SCL: J1.45
GP27_I2C_6_SCL1: J2.45
GP27_I2C_6_SCL2: J3.45
GP27_I2C_6_SCL3: J4.45
GP27_I2C_6_SCL4: J5.45
GP27_I2C_6_SCL5: J6.45
GP27_I2C_6_SCL6: J7.45
GP27_I2C_6_SCL7: J8.45
GP28: J4.25 SJ29.2
GP28_I2C_6_SDA: J1.47
GP28_I2C_6_SDA1: J2.47
GP28_I2C_6_SDA2: J3.47
GP28_I2C_6_SDA3: J4.47
GP28_I2C_6_SDA4: J5.47
GP28_I2C_6_SDA5: J6.47
GP28_I2C_6_SDA6: J7.47
GP28_I2C_6_SDA7: J8.47
GP29: J4.24 SJ28.2
GP30: J5.48 OLED5.13
GP31: J5.42 OLED5.12
GP32: J5.34 SJ40.2
GP33: J5.32 SJ39.2
GP34: J5.30 SJ35.2
GP35: J5.28 SJ34.2
GP36: J5.26 SJ38.2
GP37: J5.25 SJ37.2
GP38: J5.24 SJ36.2
GP39: J6.48 OLED6.13
GP40: J6.42 OLED6.12
GP40_I2S_2_CLK: J1.52
GP40_I2S_2_CLK1: J2.52
GP40_I2S_2_CLK2: J3.52
GP40_I2S_2_CLK3: J4.52
GP40_I2S_2_CLK4: J5.52
GP40_I2S_2_CLK5: J6.52
GP40_I2S_2_CLK6: J7.52
GP40_I2S_2_CLK7: J8.52
GP41: J6.34 SJ48.2
GP41_I2S_2_FS: J1.54
GP41_I2S_2_FS1: J2.54
GP41_I2S_2_FS2: J3.54
GP41_I2S_2_FS3: J4.54
GP41_I2S_2_FS4: J5.54
GP41_I2S_2_FS5: J6.54
GP41_I2S_2_FS6: J7.54
GP41_I2S_2_FS7: J8.54
GP42: J6.32 SJ47.2
GP42_I2S_2_RXD: J1.50
GP42_I2S_2_RXD1: J2.50
GP42_I2S_2_RXD2: J3.50
GP42_I2S_2_RXD3: J4.50
GP42_I2S_2_RXD4: J5.50
GP42_I2S_2_RXD5: J6.50
GP42_I2S_2_RXD6: J7.50
GP42_I2S_2_RXD7: J8.50
GP43: J6.30 SJ43.2
GP43_I2S_2_TXD: J1.56
GP43_I2S_2_TXD1: J2.56
GP43_I2S_2_TXD2: J3.56
GP43_I2S_2_TXD3: J4.56
GP43_I2S_2_TXD4: J5.56
GP43_I2S_2_TXD5: J6.56
GP43_I2S_2_TXD6: J7.56
GP43_I2S_2_TXD7: J8.56
GP44: J1.24 SJ4.2
GP45: J1.26 SJ6.2
GP46: J1.28 SJ1.2
GP47: J1.30 SJ3.2
GP48: J1.32 SJ7.2
GP49: J1.34 SJ8.2
GP50: J6.28 SJ42.2
GP51: J6.26 SJ46.2
GP52: J6.25 SJ45.2
GP53: J6.24 SJ44.2
GP54: J7.48 OLED7.13
GP55: J7.42 OLED7.12
GP56: J7.34 SJ56.2
GP57: J7.32 SJ55.2
GP58: J7.30 SJ51.2
GP59: J7.28 SJ50.2
GP60: J7.26 SJ54.2
GP61: J7.25 SJ53.2
GP62: J7.24 SJ52.2
GP63: J8.48 OLED8.13
GP64: J8.42 OLED8.12
GP65: J8.34 SJ64.2
GP66: J8.32 SJ63.2
GP67: J8.30 SJ59.2
GP68: J8.28 SJ58.2
GP69: J8.26 SJ62.2
GP70: J8.25 SJ61.2
GP71: J8.24 SJ60.2
GP77_SD_0_CD#: J1.60
GP77_SD_0_CD#1: J2.60
GP77_SD_0_CD#2: J3.60
GP77_SD_0_CD#3: J4.60
GP77_SD_0_CD#4: J5.60
GP77_SD_0_CD#5: J6.60
GP77_SD_0_CD#6: J7.60
GP77_SD_0_CD#7: J8.60
GP78_SD_0_CLK: J1.58
GP78_SD_0_CLK1: J2.58
GP78_SD_0_CLK2: J3.58
GP78_SD_0_CLK3: J4.58
GP78_SD_0_CLK4: J5.58
GP78_SD_0_CLK5: J6.58
GP78_SD_0_CLK6: J7.58
GP78_SD_0_CLK7: J8.58
GP79_SD_0_CMD: J1.62
GP79_SD_0_CMD1: J2.62
GP79_SD_0_CMD2: J3.62
GP79_SD_0_CMD3: J4.62
GP79_SD_0_CMD4: J5.62
GP79_SD_0_CMD5: J6.62
GP79_SD_0_CMD6: J7.62
GP79_SD_0_CMD7: J8.62
GP80_SD_0_DAT0: J1.66
GP80_SD_0_DAT1: J2.66
GP80_SD_0_DAT2: J3.66
GP80_SD_0_DAT3: J4.66
GP80_SD_0_DAT4: J5.66
GP80_SD_0_DAT5: J6.66
GP80_SD_0_DAT6: J7.66
GP80_SD_0_DAT7: J8.66
GP81_SD_0_DAT1: J1.70
GP81_SD_0_DAT2: J2.70
GP81_SD_0_DAT3: J3.70
GP81_SD_0_DAT4: J4.70
GP81_SD_0_DAT5: J5.70
GP81_SD_0_DAT6: J6.70
GP81_SD_0_DAT7: J7.70
GP81_SD_0_DAT8: J8.70
GP82_SD_0_DAT1: J2.64
GP82_SD_0_DAT2: J1.64
GP82_SD_0_DAT3: J3.64
GP82_SD_0_DAT4: J4.64
GP82_SD_0_DAT5: J5.64
GP82_SD_0_DAT6: J6.64
GP82_SD_0_DAT7: J7.64
GP82_SD_0_DAT8: J8.64
GP83_SD_0_DAT1: J2.68
GP83_SD_0_DAT2: J3.68
GP83_SD_0_DAT3: J1.68
GP83_SD_0_DAT4: J4.68
GP83_SD_0_DAT5: J5.68
GP83_SD_0_DAT6: J6.68
GP83_SD_0_DAT7: J7.68
GP83_SD_0_DAT8: J8.68
GP84_SD_CLK_FB: J1.44
GP84_SD_CLK_FB1: J2.44
GP84_SD_CLK_FB2: J3.44
GP84_SD_CLK_FB3: J4.44
GP84_SD_CLK_FB4: J5.44
GP84_SD_CLK_FB5: J6.44
GP84_SD_CLK_FB6: J7.44
GP84_SD_CLK_FB7: J8.44
GP109_SPI_2_CLK: J1.55 OLED1.16
GP109_SPI_2_CLK1: J2.55 OLED2.16
GP109_SPI_2_CLK2: J3.55 OLED3.16
GP109_SPI_2_CLK3: J4.55 OLED4.16
GP109_SPI_2_CLK4: J5.55 OLED5.16
GP109_SPI_2_CLK5: J6.55 OLED6.16
GP109_SPI_2_CLK6: J7.55 OLED7.16
GP109_SPI_2_CLK7: J8.55 OLED8.16
GP110_SPI_2_FS0: J1.53 SJ2.1
GP110_SPI_2_FS1: J2.53 SJ9.1
GP110_SPI_2_FS2: J3.53 SJ17.1
GP110_SPI_2_FS3: J4.53 SJ25.1
GP110_SPI_2_FS4: J5.53 SJ33.1
GP110_SPI_2_FS5: J6.53 SJ41.1
GP110_SPI_2_FS6: J7.53 SJ49.1
GP110_SPI_2_FS7: J8.53 SJ57.1
GP111_SPI_2_FS1: J1.51 SJ2.3
GP111_SPI_2_FS2: J2.51 SJ9.3
GP111_SPI_2_FS3: J3.51 SJ17.3
GP111_SPI_2_FS4: J4.51 SJ25.3
GP111_SPI_2_FS5: J5.51 SJ33.3
GP111_SPI_2_FS6: J6.51 SJ41.3
GP111_SPI_2_FS7: J7.51 SJ49.3
GP111_SPI_2_FS8: J8.51 SJ57.3
GP114_SPI_2_RXD: J1.59
GP114_SPI_2_RXD1: J2.59
GP114_SPI_2_RXD2: J3.59
GP114_SPI_2_RXD3: J4.59
GP114_SPI_2_RXD4: J5.59
GP114_SPI_2_RXD5: J6.59
GP114_SPI_2_RXD6: J7.59
GP114_SPI_2_RXD7: J8.59
GP115_SPI_2_TXD: J1.57 OLED1.17
GP115_SPI_2_TXD1: J2.57 OLED2.17
GP115_SPI_2_TXD2: J3.57 OLED3.17
GP115_SPI_2_TXD3: J4.57 OLED4.17
GP115_SPI_2_TXD4: J5.57 OLED5.17
GP115_SPI_2_TXD5: J6.57 OLED6.17
GP115_SPI_2_TXD6: J7.57 OLED7.17
GP115_SPI_2_TXD7: J8.57 OLED8.17
GP128_UART_1_CTS: J1.65
GP128_UART_1_CTS1: J2.65
GP128_UART_1_CTS2: J3.65
GP128_UART_1_CTS3: J4.65
GP128_UART_1_CTS4: J5.65
GP128_UART_1_CTS5: J6.65
GP128_UART_1_CTS6: J7.65
GP128_UART_1_CTS7: J8.65
GP129_UART_1_RTS: J1.63
GP129_UART_1_RTS1: J2.63
GP129_UART_1_RTS2: J3.63
GP129_UART_1_RTS3: J4.63
GP129_UART_1_RTS4: J5.63
GP129_UART_1_RTS5: J6.63
GP129_UART_1_RTS6: J7.63
GP129_UART_1_RTS7: J8.63
GP130_UART_1_RX: J1.61
GP130_UART_1_RX1: J2.61
GP130_UART_1_RX2: J3.61
GP130_UART_1_RX3: J4.61
GP130_UART_1_RX4: J5.61
GP130_UART_1_RX5: J6.61
GP130_UART_1_RX6: J7.61
GP130_UART_1_RX7: J8.61
GP131_UART_1_TX: J1.46
GP131_UART_1_TX1: J2.46
GP131_UART_1_TX2: J3.46
GP131_UART_1_TX3: J4.46
GP131_UART_1_TX4: J5.46
GP131_UART_1_TX5: J6.46
GP131_UART_1_TX6: J7.46
GP131_UART_1_TX7: J8.46
GP134_UART_2_RX: J1.22
GP134_UART_2_RX1: J2.22
GP134_UART_2_RX2: J3.22
GP134_UART_2_RX3: J4.22
GP134_UART_2_RX4: J5.22
GP134_UART_2_RX5: J6.22
GP134_UART_2_RX6: J7.22
GP134_UART_2_RX7: J8.22
GP135_UART_2_TX: J1.27
GP135_UART_2_TX1: J2.27
GP135_UART_2_TX2: J3.27
GP135_UART_2_TX3: J4.27
GP135_UART_2_TX4: J5.27
GP135_UART_2_TX5: J6.27
GP135_UART_2_TX6: J7.27
GP135_UART_2_TX7: J8.27
GP165: J1.25 SJ5.2
GP182_PWM1: J2.37
GP182_PWM2: J1.37
GP182_PWM3: J3.37
GP182_PWM4: J4.37
GP182_PWM5: J5.37
GP182_PWM6: J6.37
GP182_PWM7: J7.37
GP182_PWM8: J8.37
GP183_PWM1: J2.39
GP183_PWM2: J3.39
GP183_PWM3: J1.39
GP183_PWM4: J4.39
GP183_PWM5: J5.39
GP183_PWM6: J6.39
GP183_PWM7: J7.39
GP183_PWM8: J8.39
IREF: OLED1.24 R1.2
IREF1: OLED2.24 R9.2
IREF2: OLED3.24 R17.2
IREF3: OLED4.24 R25.2
IREF4: OLED5.24 R33.2
IREF5: OLED6.24 R41.2
IREF6: OLED7.24 R49.2
IREF7: OLED8.24 R57.2
JOY_C: R6.1 S3.CTR SJ7.1
JOY_C1: R14.1 S6.CTR SJ15.1
JOY_C2: R22.1 S9.CTR SJ23.1
JOY_C3: R30.1 S12.CTR SJ31.1
JOY_C4: R38.1 S15.CTR SJ39.1
JOY_C5: R46.1 S18.CTR SJ47.1
JOY_C6: R54.1 S21.CTR SJ55.1
JOY_C7: R62.1 S24.CTR SJ63.1
JOY_D: R3.1 S3.D SJ4.1
JOY_D1: R10.1 S6.D SJ12.1
JOY_D2: R18.1 S9.D SJ20.1
JOY_D3: R26.1 S12.D SJ28.1
JOY_D4: R34.1 S15.D SJ36.1
JOY_D5: R42.1 S18.D SJ44.1
JOY_D6: R50.1 S21.D SJ52.1
JOY_D7: R58.1 S24.D SJ60.1
JOY_L: R4.1 S3.C SJ5.1
JOY_L1: R12.1 S6.C SJ13.1
JOY_L2: R20.1 S9.C SJ21.1
JOY_L3: R28.1 S12.C SJ29.1
JOY_L4: R36.1 S15.C SJ37.1
JOY_L5: R44.1 S18.C SJ45.1
JOY_L6: R52.1 S21.C SJ53.1
JOY_L7: R60.1 S24.C SJ61.1
JOY_R: R5.1 S3.B SJ6.1
JOY_R1: R13.1 S6.B SJ14.1
JOY_R2: R21.1 S9.B SJ22.1
JOY_R3: R29.1 S12.B SJ30.1
JOY_R4: R37.1 S15.B SJ38.1
JOY_R5: R45.1 S18.B SJ46.1
JOY_R6: R53.1 S21.B SJ54.1
JOY_R7: R61.1 S24.B SJ62.1
JOY_U: R2.1 S3.A SJ3.1
JOY_U1: R11.1 S6.A SJ11.1
JOY_U2: R19.1 S9.A SJ19.1
JOY_U3: R27.1 S12.A SJ27.1
JOY_U4: R35.1 S15.A SJ35.1
JOY_U5: R43.1 S18.A SJ43.1
JOY_U6: R51.1 S21.A SJ51.1
JOY_U7: R59.1 S24.A SJ59.1
MSIC_SLP_CLK: J1.7
MSIC_SLP_CLK1: J2.7
MSIC_SLP_CLK2: J3.7
MSIC_SLP_CLK3: J4.7
MSIC_SLP_CLK4: J5.7
MSIC_SLP_CLK5: J6.7
MSIC_SLP_CLK6: J7.7
MSIC_SLP_CLK7: J8.7
OLED_!CS!: OLED1.11 SJ2.2
OLED_!CS!1: OLED2.11 SJ9.2
OLED_!CS!2: OLED3.11 SJ17.2
OLED_!CS!3: OLED4.11 SJ25.2
OLED_!CS!4: OLED5.11 SJ33.2
OLED_!CS!5: OLED6.11 SJ41.2
OLED_!CS!6: OLED7.11 SJ49.2
OLED_!CS!7: OLED8.11 SJ57.2
OSC_CLK_OUT: J1.67
OSC_CLK_OUT1: J2.67
OSC_CLK_OUT2: J3.67
OSC_CLK_OUT3: J4.67
OSC_CLK_OUT4: J5.67
OSC_CLK_OUT5: J6.67
OSC_CLK_OUT6: J7.67
OSC_CLK_OUT7: J8.67
PSW: J1.21
PSW1: J2.21
PSW2: J3.21
PSW3: J4.21
PSW4: J5.21
PSW5: J6.21
PSW6: J7.21
PSW7: J8.21
PWRBTN#: J1.17
PWRBTN#1: J2.17
PWRBTN#2: J3.17
PWRBTN#3: J4.17
PWRBTN#4: J5.17
PWRBTN#5: J6.17
PWRBTN#6: J7.17
PWRBTN#7: J8.17
RCVR_MODE: J1.31
RCVR_MODE1: J2.31
RCVR_MODE2: J3.31
RCVR_MODE3: J4.31
RCVR_MODE4: J5.31
RCVR_MODE5: J6.31
RCVR_MODE6: J7.31
RCVR_MODE7: J8.31
RESET_OUT#: J1.36
RESET_OUT#1: J2.36
RESET_OUT#2: J3.36
RESET_OUT#3: J4.36
RESET_OUT#4: J5.36
RESET_OUT#5: J6.36
RESET_OUT#6: J7.36
RESET_OUT#7: J8.36
USB_DN: J1.18
USB_DN1: J2.18
USB_DN2: J3.18
USB_DN3: J4.18
USB_DN4: J5.18
USB_DN5: J6.18
USB_DN6: J7.18
USB_DN7: J8.18
USB_DP: J1.16
USB_DP1: J2.16
USB_DP2: J3.16
USB_DP3: J4.16
USB_DP4: J5.16
USB_DP5: J6.16
USB_DP6: J7.16
USB_DP7: J8.16
USB_ID: J1.3
USB_ID1: J2.3
USB_ID2: J3.3
USB_ID3: J4.3
USB_ID4: J5.3
USB_ID5: J6.3
USB_ID6: J7.3
USB_ID7: J8.3
USB_VBUS: J1.20
USB_VBUS1: J2.20
USB_VBUS2: J3.20
USB_VBUS3: J4.20
USB_VBUS4: J5.20
USB_VBUS5: J6.20
USB_VBUS6: J7.20
USB_VBUS7: J8.20
V_BAT_BKUP: J1.23
V_BAT_BKUP1: J2.23
V_BAT_BKUP2: J3.23
V_BAT_BKUP3: J4.23
V_BAT_BKUP4: J5.23
V_BAT_BKUP5: J6.23
V_BAT_BKUP6: J7.23
V_BAT_BKUP7: J8.23
VCC: C1.1 OLED1.26
VCC1: C7.1 OLED2.26
VCC2: C13.1 OLED3.26
VCC3: C19.1 OLED4.26
VCC4: C25.1 OLED5.26
VCC5: C31.1 OLED6.26
VCC6: C37.1 OLED7.26
VCC7: C43.1 OLED8.26
VCOMH: C5.1 OLED1.25
VCOMH1: C11.1 OLED2.25
VCOMH2: C17.1 OLED3.25
VCOMH3: C23.1 OLED4.25
VCOMH4: C29.1 OLED5.25
VCOMH5: C35.1 OLED6.25
VCOMH6: C41.1 OLED7.25
VCOMH7: C47.1 OLED8.25
VSYS: C6.1 J1.2 J1.4 J1.6 JP1.2 OLED1.6
VSYS1: C12.1 J2.2 J2.4 J2.6 JP2.2 OLED2.6
VSYS2: C18.1 J3.2 J3.4 J3.6 JP3.2 OLED3.6
VSYS3: C24.1 J4.2 J4.4 J4.6 JP4.2 OLED4.6
VSYS4: C30.1 J5.2 J5.4 J5.6 JP5.2 OLED5.6
VSYS5: C36.1 J6.2 J6.4 J6.6 JP6.2 OLED6.6
VSYS6: C42.1 J7.2 J7.4 J7.6 JP7.2 OLED7.6
VSYS7: C48.1 J8.2 J8.4 J8.6 JP8.2 OLED8.6